# Altium PCB Folie_KeyBoard_V100.PcbDoc
Units mm, origin at the board's own origin, x right, y up, seen from the top; angles counter-clockwise.
Board outline 85 x 160 mm, 2 copper layers (Top Layer, Bottom Layer); 10 components, 10 nets, 30 pads, 10 vias.
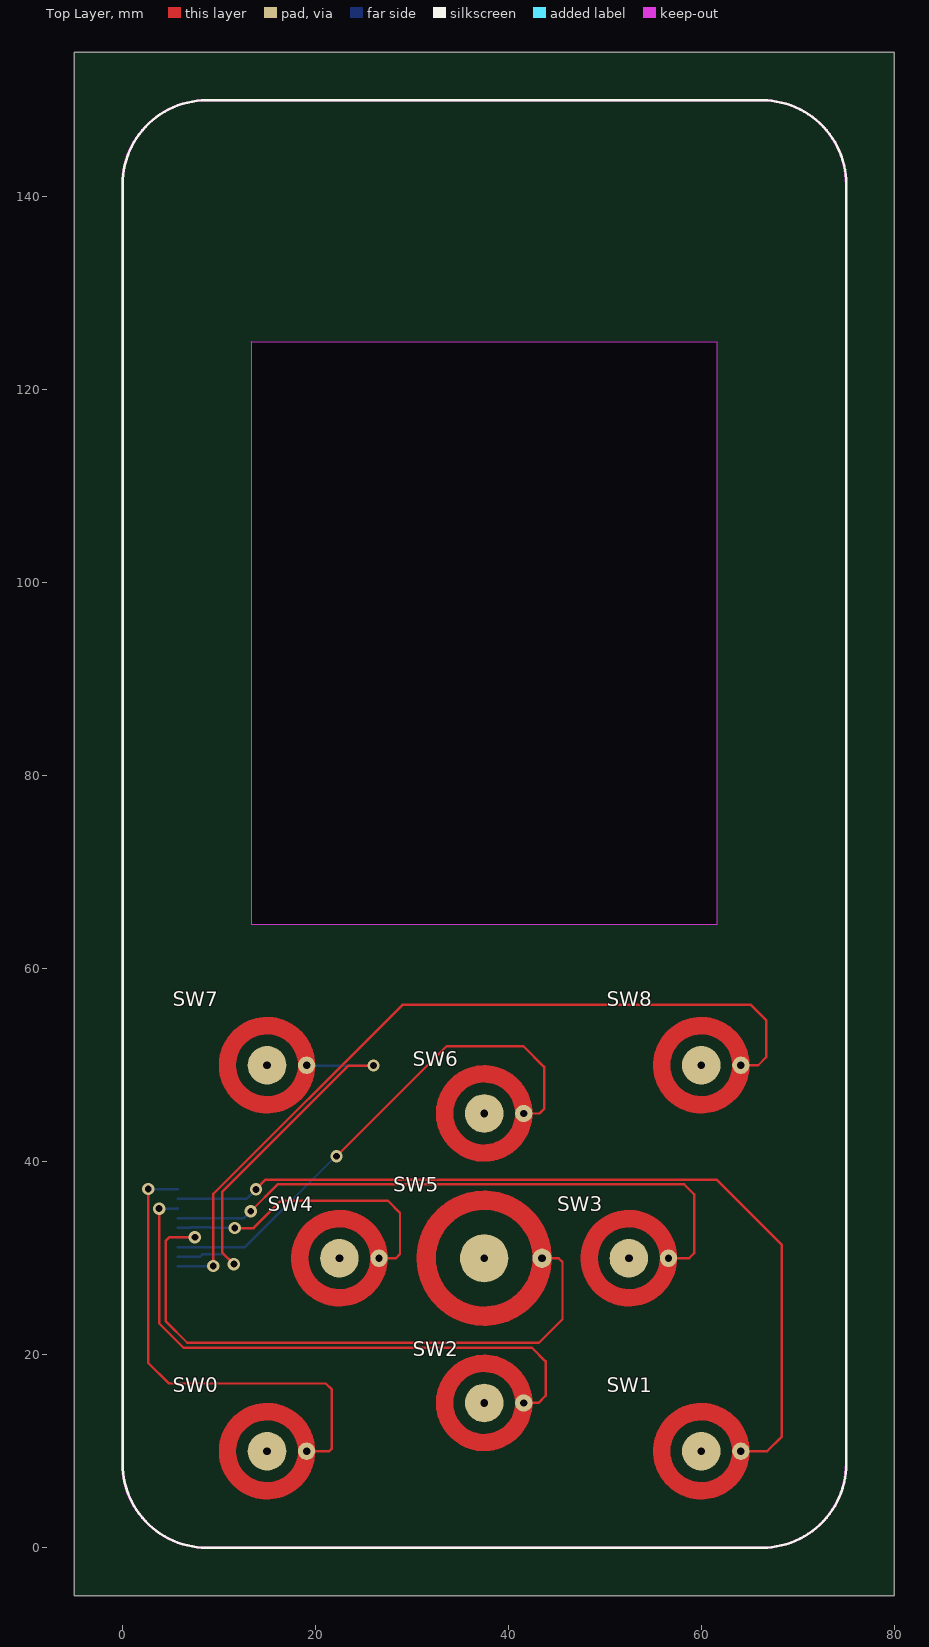
[diagram p0: Top Layer view]
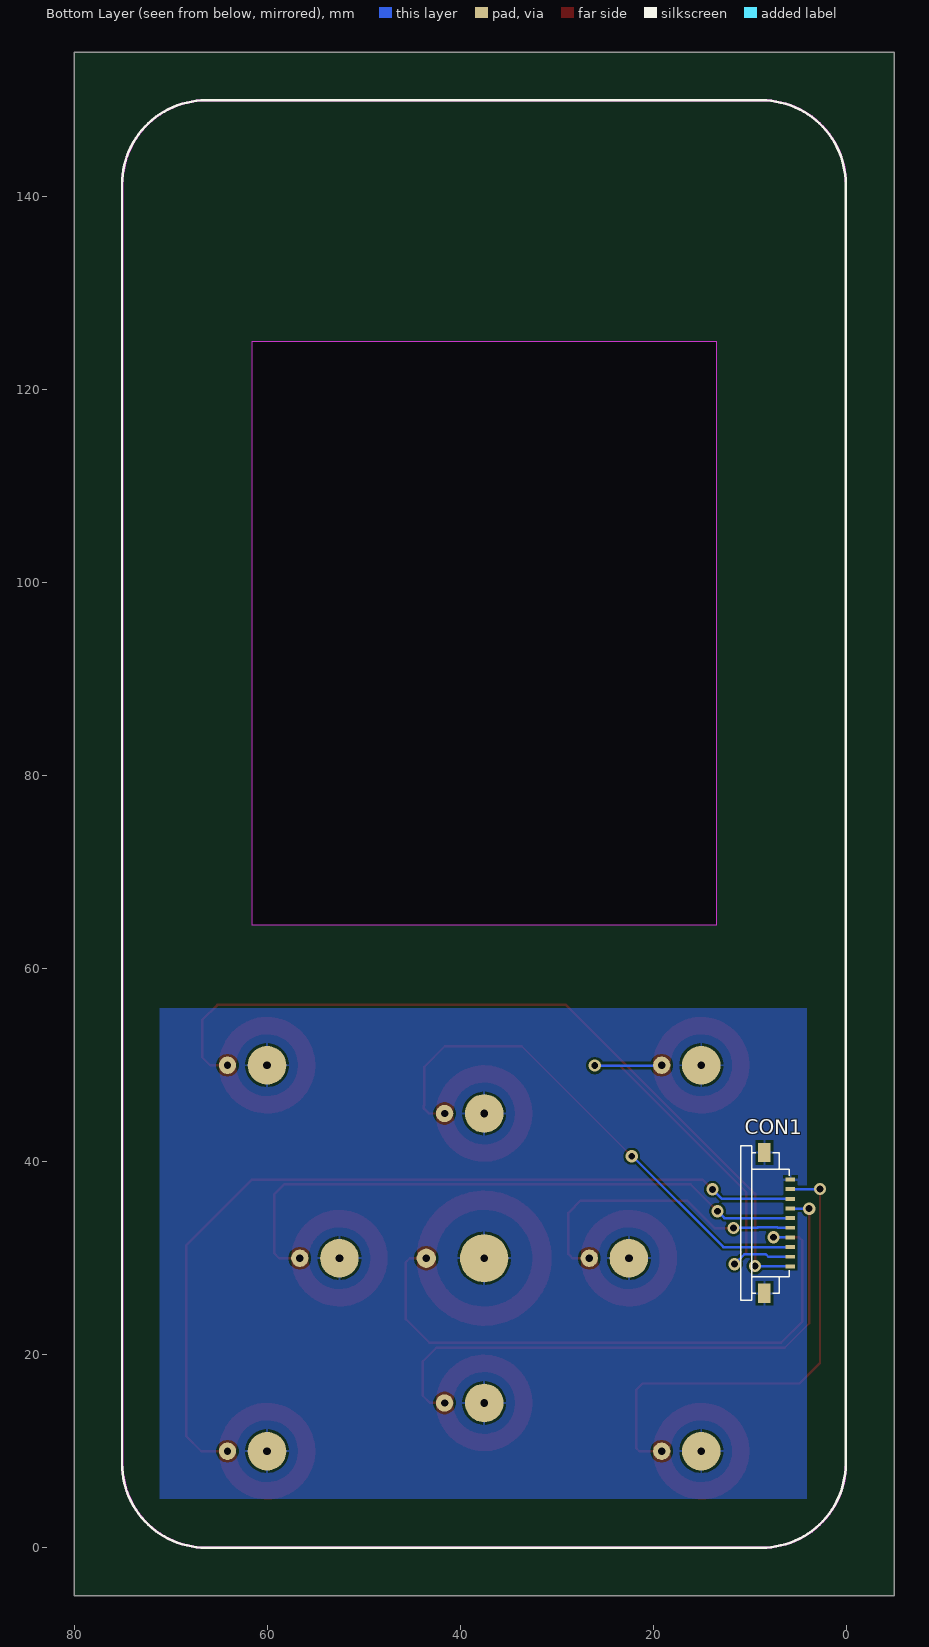
[diagram p1: Bottom Layer view, seen from below]

## Layer stack, top to bottom
Top Solder: solder mask 0.0102, Solder Resist, Dk 3.5
Top Layer: signal copper 0.0356
Dielectric 1: dielectric 0.32, FR-4, Dk 4.8
Bottom Layer: signal copper 0.0356
Bottom Solder: solder mask 0.0102, Solder Resist, Dk 3.5

## Board outline
-5,-5 -5,155 80,155 80,-5
cut-out: 13.386,124.975 61.595,124.975 61.595,64.56 13.411,64.56 13.411,124.95

## Design rules (kind name [scope] priority, off if disabled: settings)
Clearance [All] p1: gap=0.254 ignorepadtopadclearanceinfootprint=FALSE except(0: Arc-Hole Track-Hole SMDPad-Hole THPad-Hole Via-Hole Fill-Hole Poly-Hole Region-Hole Text-Hole)
PolygonConnect [All] p1: connectstyle=Relief reliefconductorwidth=0.254 reliefentries=4 polygonreliefangle="90 Angle" airgapwidth=0.254
RoutingVias [All] p1: holewidth=0.711 width=1.27 viastyle="Through Hole" minholewidth=0.711 minwidth=1.27 maxholewidth=0.711 maxwidth=1.27
SilkToSolderMaskClearance [IsPad] p1 off: minsilkscreentomaskgap=0.254 clearancetoexposedcopper=TRUE
SolderMaskExpansion [All] p1: expansion=0.102 istentingtop=FALSE
Width [All] p1: maxlimit=2 minlimit=0.254 preferedwidth=0.254 minimp=50.000000 maximp=50.000000 favimp=50.000000
29 further rules are at their usual default settings.

## Components (designator, comment, footprint, x,y, rotation, side; value= is the part's Value field where it differs from the comment)
CON1 "200528-0100" CON_FPC10_1MM_MOLEX_200528-0100 7.112,33.655 r270 bottom
SW0 "CLICKSON-8.2mm" CLICKSON-8.2mm 15,10 r0 top
SW1 "CLICKSON-8.2mm" CLICKSON-8.2mm 60,10 r0 top
SW2 "CLICKSON-8.2mm" CLICKSON-8.2mm 37.5,15 r0 top
SW3 "CLICKSON-8.2mm" CLICKSON-8.2mm 52.5,30 r0 top
SW4 "CLICKSON-8.2mm" CLICKSON-8.2mm 22.5,30 r0 top
SW5 "CLICKSON-12mm" CLICKSON-12mm 37.5,30 r0 top
SW6 "CLICKSON-8.2mm" CLICKSON-8.2mm 37.5,45 r0 top
SW7 "CLICKSON-8.2mm" CLICKSON-8.2mm 15,50 r0 top
SW8 "CLICKSON-8.2mm" CLICKSON-8.2mm 60,50 r0 top

## Footprints (in the part's own frame and the unit in brackets; to place one, negate y for a bottom-side part, rotate by r counter-clockwise, add the part's x,y. Pads: shape width x height; smd on the part's side, far side on the other; paste and mask are expansions set on the pad)
CLICKSON-8.2mm [mm]
  round 4 hole 0.8: 1(0,0)
  round 1.8 hole 0.762: 2(4.1,0)
  Top Layer circle w1.8: c0,0 r4.1
CLICKSON-12mm [mm]
  round 5 hole 0.8: 1(0,0)
  round 2 hole 0.8: 2(6,0)
  Top Layer circle w2: c0,0 r6
CON_FPC10_1MM_MOLEX_200528-0100 [mm]
  rect 0.4x1 smd: 1(-4.5,1.35) 2(-3.5,1.35) 3(-2.5,1.35) 4(-1.5,1.35) 5(-0.5,1.35) 6(0.5,1.35) 7(1.5,1.35) 8(2.5,1.35) 9(3.5,1.35) 10(4.5,1.35)
  rect 2x1.3 smd: M1(-7.3,-1.35) M2(7.3,-1.35)
  silkscreen extent -8,-3.78 8,1.25, body extent -8,-3.77 8,1.53, height 1.88

## Part data
CON1: library part 228, "FFC / FPC Board Connector, 1 mm, 10 Contacts, Receptacle, Easy-On, Surface Mount", Part Number=CON_FPC_MOLEX_200528-0100, Azonosító=228, Category=Connectors, Subcategory=CONN_Board-to-Wire, Supplier 1=MOUSER, Supplier 1 order number=538-200528-0100
SW0 SW1 SW2 SW3 SW4 SW6 SW7 SW8: library part 404, "CLICKSON-8.2mm for folie tastature", Azonosító=404, Category=Electro-mechanicals, Part Number=CLICKSON-8.2mm, Subcategory="ELME_Board Switch"
SW5: library part 405, "CLICKSON-12mm for folie tastature", Azonosító=405, Category=Electro-mechanicals, Part Number=CLICKSON-12mm, Subcategory="ELME_Board Switch"

## Via types
v1: diameter 1.27, hole 0.711, Top Layer to Bottom Layer, 10 vias

## Nets (pads, with @x,y where several pads share a name; then routed paths per layer and width w, separated by ;. In a path a pad name is that pad's centre, name@x,y a point inside that pad or via, vN(x,y) a via of type N, cw(c..) or ccw(c..) an arc to the next point about the centre after c; other vN are vias at no path point)
BUTTON_0: CON1.2 SW0.2 | length 50.1
  Top Layer w0.254: v1(2.692,37.186) 2.692,19.152 4.826,17.018 21.082,17.018 21.717,16.383 21.717,10.287 21.43,10 SW0.2
  Bottom Layer w0.254: v1(2.692,37.186) 2.718,37.16 5.757,37.16 CON1.2
BUTTON_1: CON1.3 SW1.2 | length 90.9
  Top Layer w0.254: v1(13.843,37.135) 14.859,38.151 61.57,38.151 68.351,31.369 68.351,11.532 66.82,10 SW1.2
  Bottom Layer w0.254: CON1.3 12.863,36.155 v1(13.843,37.135)
BUTTON_2: CON1.4 SW2.2 | length 61.7
  Top Layer w0.254: v1(3.821,35.134) 3.81,35.123 3.81,23.266 6.35,20.726 42.443,20.726 43.866,19.304 43.866,15.748 43.118,15 SW2.2
  Bottom Layer w0.254: v1(3.821,35.134) 5.741,35.134 CON1.4
BUTTON_3: CON1.5 SW3.2 | length 64.4
  Top Layer w0.254: v1(13.312,34.868) 16.087,37.643 58.242,37.643 59.275,36.61 59.275,30.532 58.743,30 SW3.2
  Bottom Layer w0.254: CON1.5 12.599,34.155 v1(13.312,34.868)
BUTTON_4: CON1.6 SW4.2 | length 31.4
  Top Layer w0.254: v1(11.659,33.139) 11.676,33.122 13.614,33.122 16.459,35.966 27.508,35.966 28.778,34.696 28.778,30.429 28.349,30 SW4.2
  Bottom Layer w0.254: CON1.6 7.066,33.155 7.098,33.187 9.127,33.187 9.159,33.155 11.643,33.155 v1(11.659,33.139)
BUTTON_5: CON1.7 SW5.2 | length 64.5
  Top Layer w0.254: v1(7.518,32.171) 7.504,32.156 4.851,32.156 4.521,31.826 4.521,23.444 6.731,21.234 43.18,21.234 45.618,23.673 45.618,29.591 45.209,30 SW5.2
  Bottom Layer w0.254: CON1.7 5.77,32.163 7.51,32.163 v1(7.518,32.171)
BUTTON_6: CON1.8 SW6.2 | length 54.1
  Top Layer w0.254: v1(22.2,40.564) 33.604,51.968 41.58,51.968 43.713,49.835 43.713,45.822 43.739,45.796 43.739,45.512 43.227,45 SW6.2
  Bottom Layer w0.254: CON1.8 12.715,31.155 22.123,40.564 v1(22.2,40.564)
BUTTON_7: CON1.9 SW7.2 | length 42.4
  Top Layer w0.254: v1(11.557,29.388) 10.338,30.607 10.338,36.855 23.444,49.962 v1(26.035,49.962)
  Bottom Layer w0.254: CON1.9 8.057,30.155 8.306,30.404 10.541,30.404 v1(11.557,29.388) ; SW7.2 19.138,49.962 v1(26.035,49.962)
BUTTON_8: CON1.10 SW8.2 | length 84.1
  Top Layer w0.254: v1(9.423,29.185) 9.423,36.659 29.025,56.261 65.151,56.261 66.726,54.686 66.726,50.825 65.9,50 SW8.2
  Bottom Layer w0.254: CON1.10 9.394,29.155 v1(9.423,29.185)
GND: CON1.1 CON1.M1 CON1.M2 SW0.1 SW1.1 SW2.1 SW3.1 SW4.1 SW5.1 SW6.1 SW7.1 SW8.1

## Polygon pours and split planes (outlines as drawn)
GND on Bottom Layer "GND_L02_P000" (solid, pour order 0): 4.064,5.08 4.064,55.88 71.12,55.88 71.12,5.08

## Keep-outs
Keep-Out Layer:
  lines w0.254: 0,8.719 ccw(c8.719,8.719) 8.719,0 66.281,0 ccw(c66.281,8.719) 75,8.719 75,141.281 ccw(c66.281,141.281) 66.281,150 8.719,150 ccw(c8.719,141.281) 0,141.281 0,8.719

## Silkscreen, mask and mechanical layers (free items; w line width, h text height)
Top Overlay:
  lines w0.254: 0.032,8.718 ccw(c8.751,8.718) 8.751,-0.001 66.313,-0.001 ccw(c66.314,8.718) 75.032,8.718 75.032,141.281 ccw(c66.313,141.281) 66.313,149.999 8.751,149.999 ccw(c8.751,141.281) 0.032,141.281 0.032,8.718
Bottom Overlay:
  lines w0.254: 0.032,8.718 ccw(c8.751,8.718) 8.751,-0.001 66.313,-0.001 ccw(c66.314,8.718) 75.032,8.718 75.032,141.281 ccw(c66.313,141.281) 66.313,149.999 8.751,149.999 ccw(c8.751,141.281) 0.032,141.281 0.032,8.718
Mechanical 1:
  lines w0.254: 13.386,64.586 13.386,124.975 61.595,124.975 61.595,64.56 13.411,64.56 ; -5,-5 -5,-5 ; -5,-5 80,-5 80,155 ; -5,-5 -5,155 80,155 ; 80,155 80,155
Top Courtyard:
  lines w0.254: -0.686,0 8.966,0 ; 0,-0.61 0,9.246 ; 13.386,62.586 13.411,62.56